# EAGLE board finished_schematic (EAGLE 9.5.2)
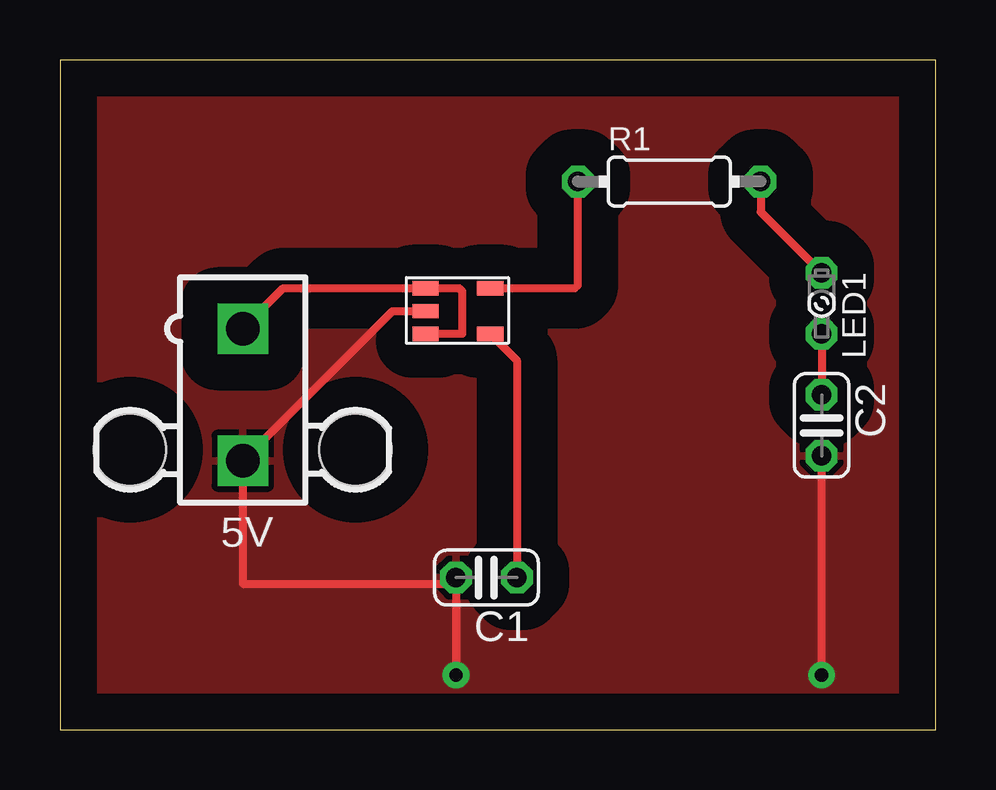
[diagram p0: board, top side]
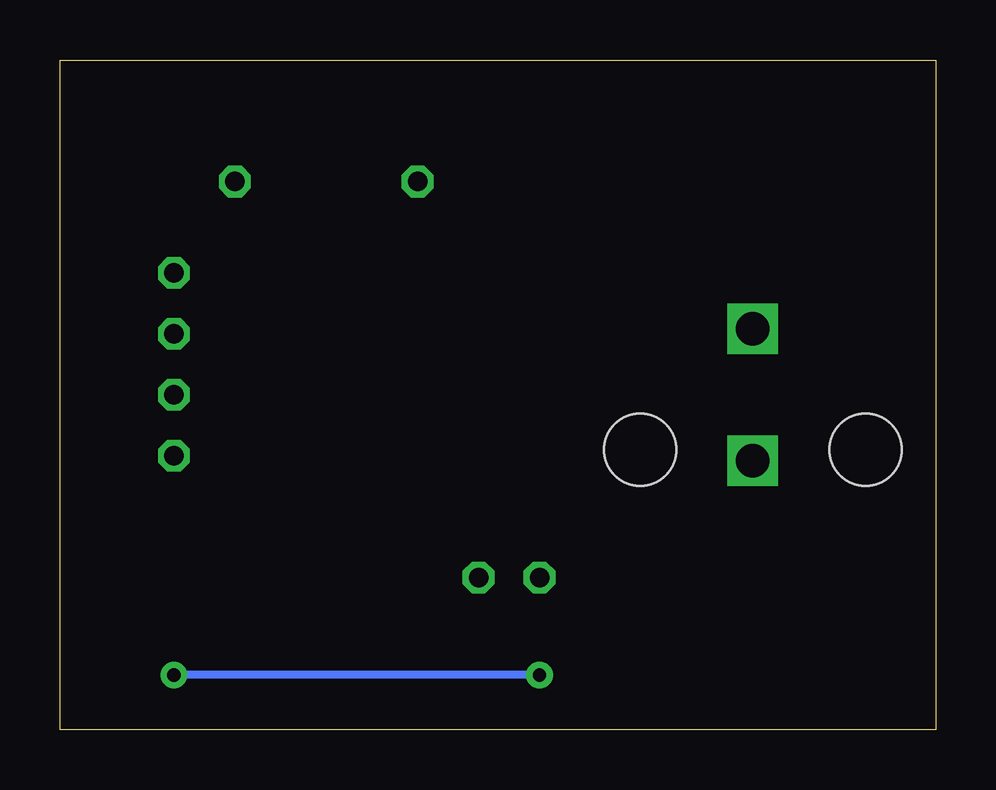
[diagram p1: board, bottom side, seen from below]

Size 36.5 x 27.93 mm. Coordinates in mm from the lower left corner, seen from the top.
Outline: 0,0 36.5,0 36.5,27.93 0,27.93 0,0
Copper layers (1*16): Top 0.035mm / dielectric 1.5mm / Bottom 0.035mm
Design rules "MWSEagleDesignRules3": minimum track width 13mil, minimum drill 22mil, track to track 8.5mil, track to pad 8.5mil, pad to pad 8.5mil, via to via 8.5mil, smd to smd 8mil, copper to edge 40mil, drill to drill 8mil, minimum pad ring 10mil, minimum via ring 8mil, stop-mask expansion 4mil, vias tented up to drill 0mil, thermal gap 10mil

## Footprints (pad centres in the part's own frame; a part is rotated, then mirrored left to right if it is on the bottom)
5566-2 = drill 1.4 square: 1 0,-2.75; 2 0,2.75 | hole 3: 4.7,2.29; -4.7,2.29
C025-024X044 = drill 0.813 octagon: 1 -1.27,0; 2 1.27,0
LSU260 = drill 0.813 octagon: A -1.27,0; K 1.27,0
0204/7 = drill 0.813 octagon: 1 -3.81,0; 2 3.81,0
TPS799 = smd 1.1 x 0.6: EN 0,0; GND 0,0.95; IN 0,1.9; NR 2.7,0; OUT 2.7,1.9

## Placement (x,y rotation side)
5V  5566-2  [5566-2]  7.62,13.97 180 top
C1  0.01*10^-6  [C025-024X044]  17.78,6.35 180 top
C2  2.2*10^-6  [C025-024X044]  31.75,12.7 270 top
LED1  [LSU260]  31.75,17.78 270 top
R1  100  [0204/7]  25.4,22.86 0 top
U$1  TPS799  [TPS799]  15.24,16.51 0 top

## Library data of the parts
5V = con-molex; MF: MOLEX; OC_FARNELL: 1822072; OC_NEWARK: unknown
C1 C2 = rcl; SPICEPREFIX: C
LED1 = led
R1 = rcl; SPICEPREFIX: R
U$1 = tps799

## Nets
GND: 5V.2 C1.2 C2.2 U$1.GND
N$1: C1.1 U$1.NR
N$2: R1.1 U$1.OUT
N$3: LED1.A R1.2
N$4: C2.1 LED1.K
N$5: 5V.1 U$1.EN U$1.IN

## Tracks (layer width: path | path; a pad name or v marks a point on that pad's centre or on a via)
GND  (via drill 0.56)
  Top 0.33: U$1.GND 13.86,17.46 5V.2 7.62,6.1 16.26,6.1 C1.2 v16.51,2.29 | v31.75,2.29 C2.2
  Bottom 0.33: v16.51,2.29 v31.75,2.29
  pour Top (isolate 1.524): 0,27.94 36.58,27.94 36.58,0 0,0
N$1
  Top 0.33: U$1.NR 19.05,15.4 C1.1
N$2
  Top 0.33: U$1.OUT 21.46,18.41 21.59,18.54 R1.1
N$3
  Top 0.33: R1.2 29.21,21.59 LED1.A
N$4
  Top 0.33: LED1.K C2.1
N$5
  Top 0.33: 5V.1 9.31,18.41 U$1.IN 16.64,18.41 16.76,18.29 16.76,16.51 U$1.EN